# Altium PCB Ninja_ECU_PCB.PcbDoc (part 2 of 3)
Units mm, origin at the board's own origin, x right, y up, seen from the top; angles counter-clockwise.
Board outline 80.01 x 89.03 mm, 4 copper layers (Top Layer, Signal Layer 1, Signal Layer 2, Bottom Layer), stack 0.778 mm thick; 215 components, 159 nets, 825 pads, 332 vias.
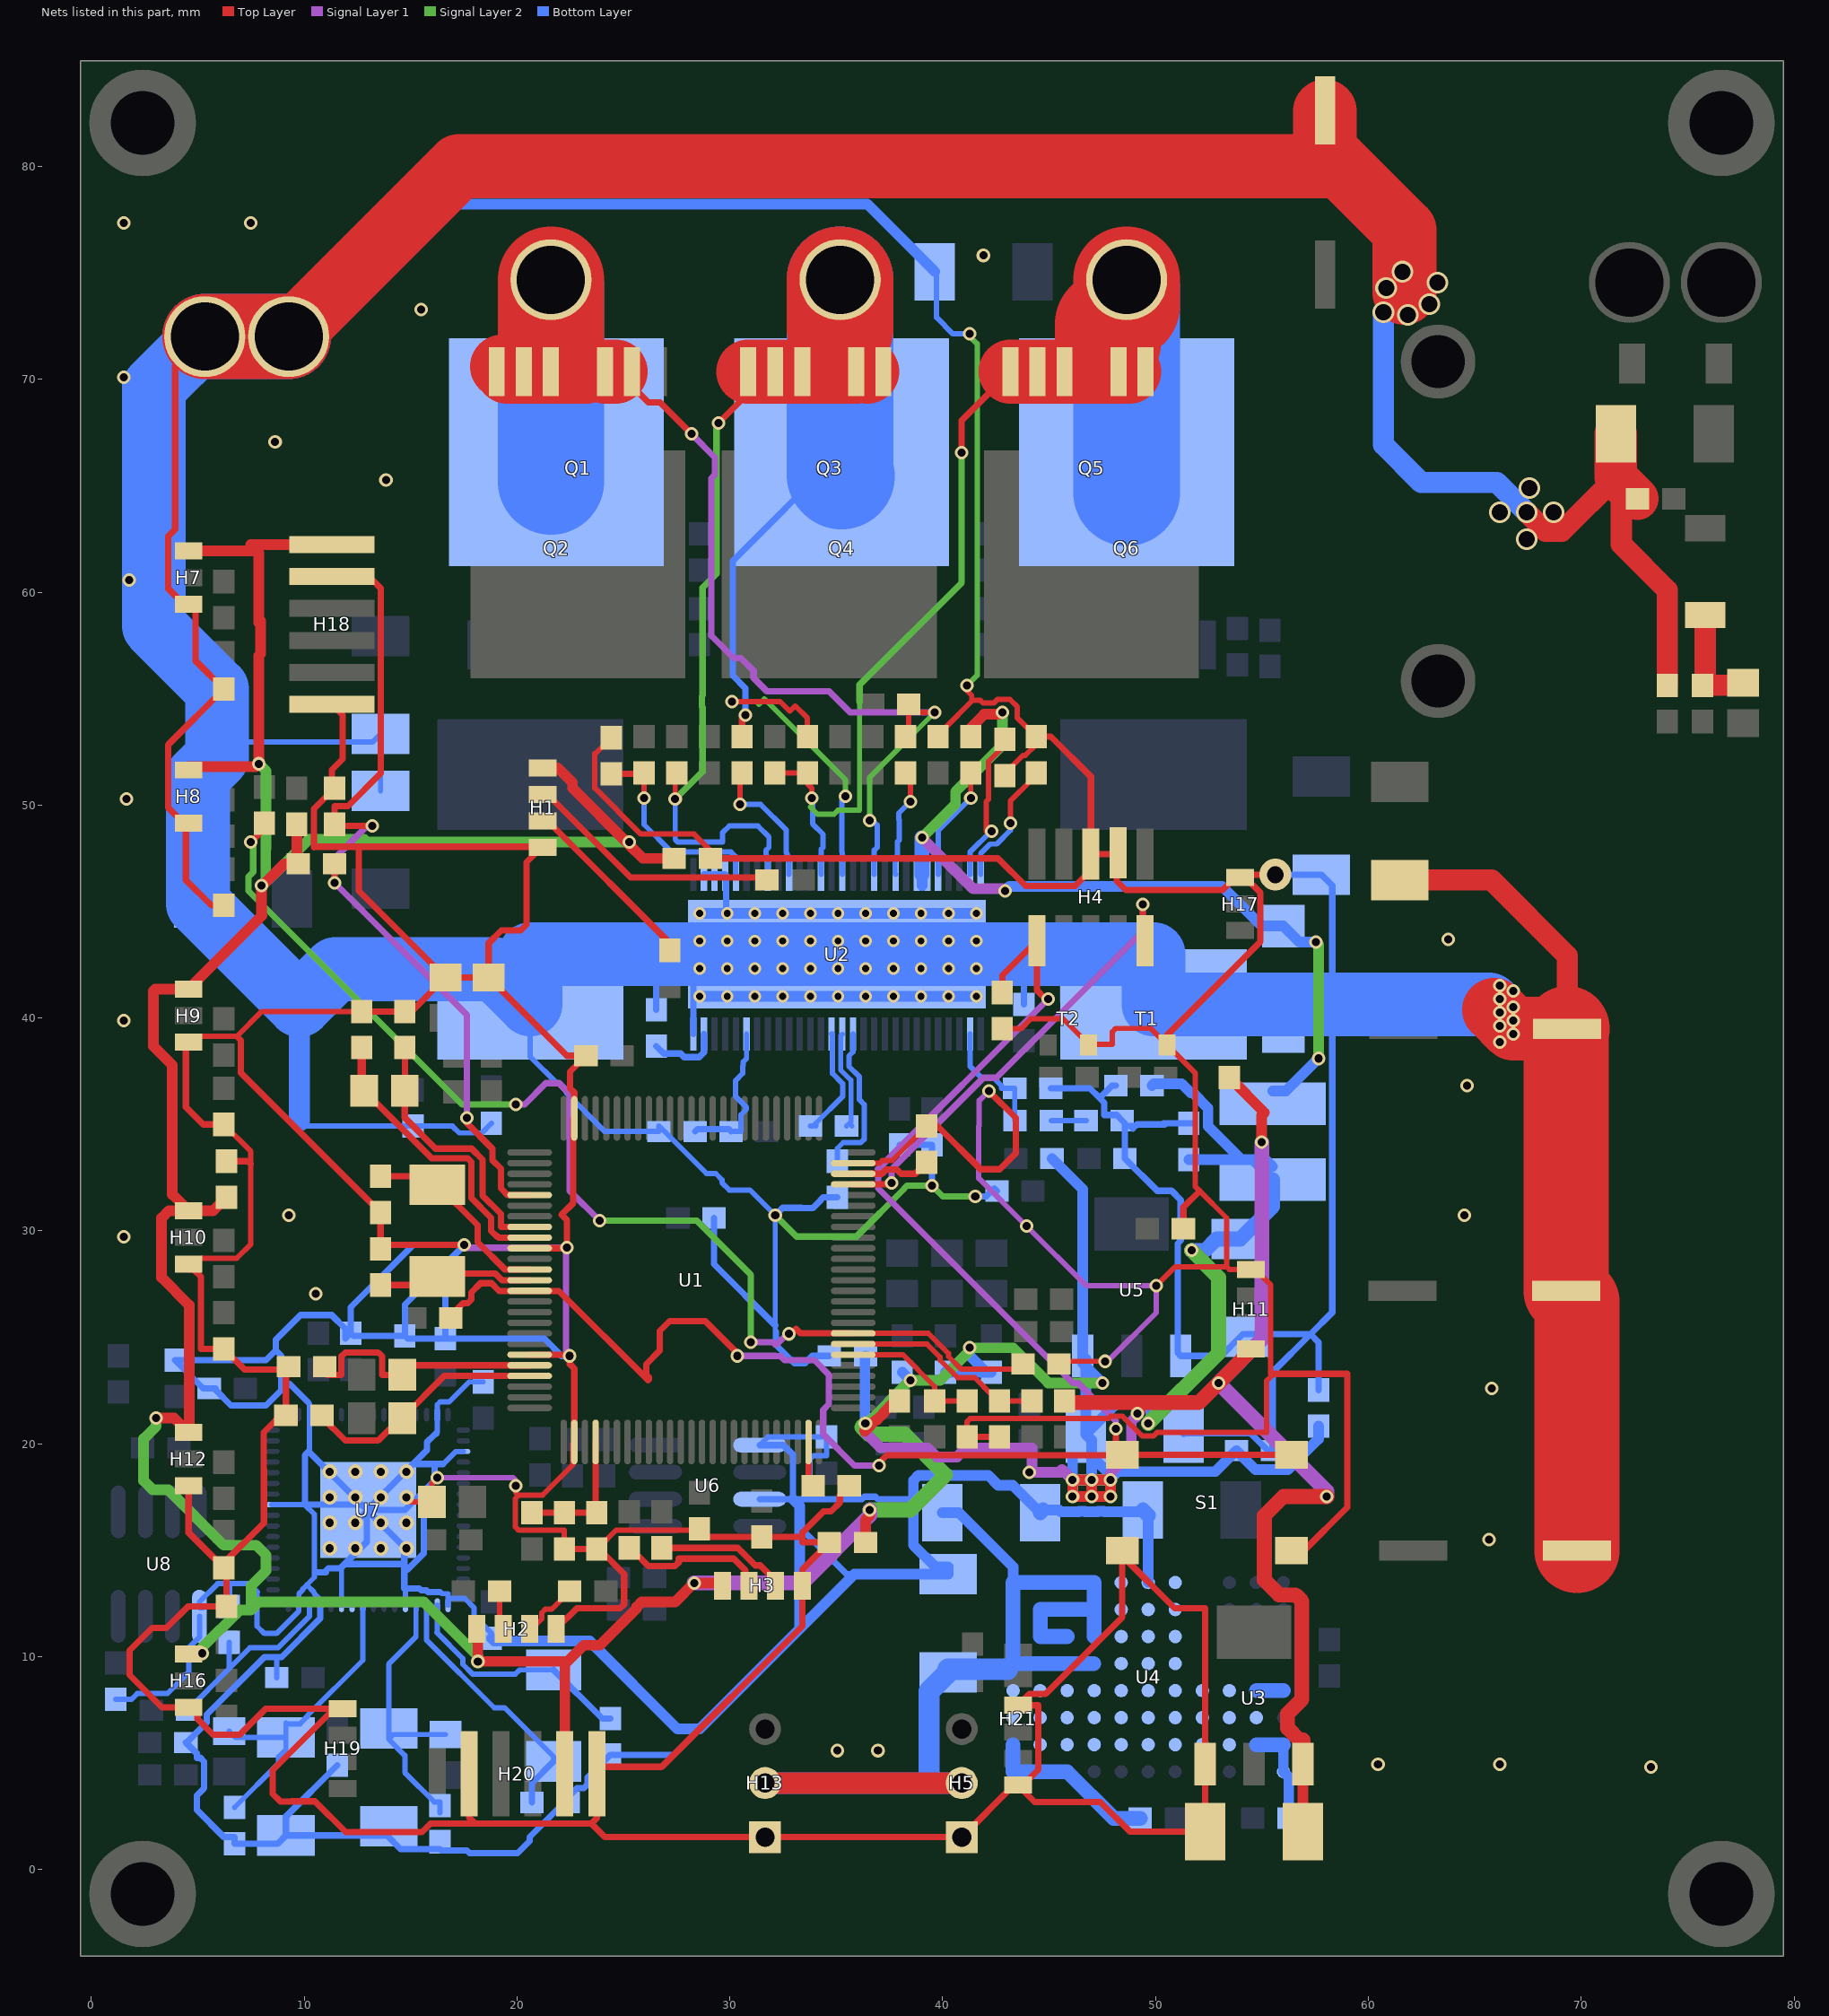
[diagram p4: the nets of this part, all layers, seen from the top]

## Via types
v1: diameter 0.635, hole 0.381, Top Layer to Bottom Layer, tented both sides, 252 vias
v2: diameter 0.584, hole 0.33, Top Layer to Bottom Layer, 44 vias
v3: diameter 0.69, hole 0.381, Top Layer to Bottom Layer, tented both sides, 16 vias
v4: diameter 1.016, hole 0.762, Top Layer to Bottom Layer, tented both sides, 11 vias
v5: diameter 1.5, hole 0.8, Top Layer to Bottom Layer, tented both sides, 3 vias
v6: diameter 1.27, hole 0.711, Top Layer to Bottom Layer, tented both sides, 3 vias
v7: diameter 1.524, hole 1.27, Top Layer to Bottom Layer, 2 vias
v8: diameter 0.635, hole 0.381, Top Layer to Bottom Layer, 1 vias

## Nets (pads, with @x,y where several pads share a name; then routed paths per layer and width w, separated by ;. In a path a pad name is that pad's centre, name@x,y a point inside that pad or via, vN(x,y) a via of type N, cw(c..) or ccw(c..) an arc to the next point about the centre after c; other vN are vias at no path point) (continued)
5V_IRFS: C19.2 C20.2 C21.2 C22.2 C25.2 C26.2 C27.2 C29.2 C32.2 C35.1 C57.2 H1.4 H2.4 H3.4 H7.3 H8.3 H9.3 H10.3 H11.4 H12.3 H16.3 H18.6 H20.2 L4.2 R32.2 R34.2 R36.2 R37.2 R41.1 R42.1 R43.1 R53.2 R87.1 U3.3 U5.3 | length 345
  Top Layer w0.5: v1(3.048,21.209) 3.897,21.209 H12.3@4.572,20.534 4.596,20.558 4.596,26.519 3.302,27.813 3.302,30.607 3.643,30.948 H10.3@4.38,30.948 ; H9.3@4.38,41.362 3.008,41.362 2.921,41.275 2.921,38.671 3.809,37.783 3.809,31.711 H10.3@4.572,30.948 5.724,30.948 C20.2@6.35,31.574 ; H16.3@4.572,10.12 5.167,10.12 v1(5.207,10.16) H16.3@4.826,10.16 ; H9.3@4.572,41.362 8.024,44.814 8.001,44.836 v1(8.001,46.228) 8.054,46.228 9.07,47.244 R37.2@9.73,47.244 9.652,47.322 R32.2@9.652,49.1 ; H8.3@4.572,51.649 4.572,51.801 v1@7.732,51.801 ; H7.3@4.572,61.936 7.787,61.936 ; v1(7.874,51.943) 7.874,57.021 7.959,57.106 7.959,58.647 7.874,58.563 7.874,61.849 7.787,61.936 ; H18.6@11.303,62.237 7.486,62.237 7.787,61.936 ; H2.4@18.099,11.303 18.161,11.365 v1(18.161,9.779) 22.373,9.779 ; H1.4@21.209,51.751 21.909,51.751 22.606,51.054 22.606,50.8 25.146,48.26 v1(25.273,48.26) 25.273,48.133 25.908,47.498 C21.2@27.383,47.498 ; H20.2@22.249,4.494 22.249,9.656 22.373,9.779 ; H3.4@29.656,13.335 29.529,13.462 v1(28.321,13.462) 27.431,12.572 25.851,12.572 25.615,12.336 25.615,12.259 23.897,10.54 23.133,10.54 22.373,9.779 ; v1(36.366,20.955) 36.366,20.618 ; C22.2@36.371,15.367 36.371,16.432 36.576,16.637 v1(36.576,16.891) ; R36.2@37.895,22.02 37.768,22.02 37.246,21.498 37.246,21.457 36.923,21.134 36.882,21.134 36.366,20.618 ; 48.895,21.931 49.276,21.55 v1(49.149,21.423) ; R87.1@53.467,37.211 55.118,35.56 54.991,35.433 v1(54.991,34.163) ; C19.2@56.924,1.778 U3.3@56.924,4.953 ; 36.366,20.618 36.366,20.606 36.349,20.588 36.343,20.595 36.366,20.618 ; v1(46.99,17.526) v1(46.99,18.302) ; v1(46.99,17.526) v1(46.101,17.526) v1(46.101,18.302) v1(46.99,18.302) ; v1(46.99,17.526) v1(47.879,17.526) v1(47.879,18.302) v1(46.99,18.302)
  Top Layer w0.7: R34.2@45.72,22.02 45.809,21.931 48.895,21.931 52.03,21.931 v1(52.959,22.86) 54.483,24.384 H11.4@54.483,24.449 ; U3.3@56.924,4.953 56.924,6.092 56.756,6.092 56.203,6.645 56.203,7.325 56.876,7.998 56.876,12.611 56.582,12.905 55.802,12.905 55.111,13.596 55.111,16.63 56.007,17.526 v1(58.039,17.526)
  Signal Layer 1 w0.5: v1(36.366,20.955) 36.366,20.565 36.349,20.547 37.084,19.812 39.288,19.812 39.717,19.383 40.674,19.383 41.103,19.812 44.196,19.812 44.196,18.796 v1(44.069,18.669) 45.48,18.669 45.607,18.796 v1(46.101,18.302) v1(46.99,18.302) ; v1@46.101,18.288 v1(46.101,17.526) v1(46.99,17.526) ; v1(49.149,21.423) 49.149,21.336 48.862,21.049 48.862,19.583 47.879,18.6 v1(47.879,18.302) ; v1(46.99,17.526) v1(46.99,18.302) ; v1(46.99,17.526) v1(47.879,17.526) v1(47.879,18.302) ; v1(46.99,18.302) v1(47.879,18.302)
  Signal Layer 1 w0.7: v1(28.321,13.462) 33.401,13.462 36.576,16.637 v1(36.576,16.891) ; v1(54.991,34.163) 54.991,25.146 55.118,25.019 v1(52.959,22.86) 58.039,17.78 v1(58.039,17.526)
  Signal Layer 2 w0.5: v1(3.048,21.209) 3.048,20.828 2.455,20.235 2.455,18.269 2.884,17.84 3.623,17.84 6.223,15.24 7.749,15.24 8.213,14.776 8.213,14.035 7.515,13.338 7.515,12.214 7.874,12.573 15.621,12.573 18.161,10.033 v1(18.161,9.779) ; v1(5.207,10.16) 5.207,10.427 6.972,12.192 7.493,12.192 ; v1(7.874,51.943) 8.213,51.604 8.213,47.962 8.195,47.944 8.195,46.37 10.213,48.387 12.825,48.387 12.952,48.26 v1(25.273,48.26) ; v1(36.366,20.955) 36.366,20.872 v1(38.481,22.987) 39.878,22.987 41.275,24.384 v1(41.275,24.511) 43.307,24.511 44.958,22.86 v1(47.498,22.86) ; v1@44.115,18.75 44.215,18.65 45.753,18.65 v1(46.101,18.302) v1(46.99,18.302) ; v1@46.101,18.288 v1(46.101,17.526) v1(46.99,17.526) ; v1(46.99,17.526) v1(46.99,18.302) ; v1(46.99,17.526) v1(47.879,17.526) v1(47.879,18.302) v1(46.99,18.302)
  Signal Layer 2 w0.7: v1(36.366,20.955) 36.196,20.784 36.527,20.453 38.221,20.453 40.132,18.542 38.481,16.891 v1(36.576,16.891) ; v1(49.657,20.955) 52.959,24.257 52.959,27.813 v1(51.689,29.083)
  Bottom Layer w0.5: 36.349,20.601 36.349,24.108 C26.2@36.371,24.13 ; R43.1@38.1,23.368 v1(38.481,22.987) ; R42.1@40.132,23.368 R41.1@42.037,23.368 ; v1(41.275,24.511) 41.275,24.13 R41.1@42.037,23.368 ; R41.1@42.291,23.368 R41.1@42.037,23.368 ; R53.2@45.134,33.401 46.581,31.954 U5.3@46.581,24.13 ; C27.2@46.101,19.318 v1(46.101,18.302) ; v1(47.498,22.86) U5.3@46.722,23.636 ; v1(49.657,20.955) 49.784,21.082 49.784,21.971 48.246,21.971 C27.2@46.722,20.447 ; C25.2@49.833,36.83 49.918,36.915 51.225,36.915 51.647,36.493 51.74,36.493 52.464,35.769 52.464,34.912 L4.2@54.024,33.352 ; C32.2@51.562,33.352 L4.2@54.024,33.352 ; L4.2@55.499,32.407 L4.2@54.554,33.352 ; L4.2@55.499,33.02 55.167,33.352 L4.2@54.554,33.352 ; C35.1@57.658,20.828 57.658,20.225 56.216,18.783 54.701,18.783 C29.2@53.799,19.685 52.809,18.695 48.225,18.695 v1@47.879,18.349 ; v1(46.101,18.302) v1(46.99,18.302) ; v1(46.101,18.302) v1(46.101,17.526) v1(46.99,17.526) v1(47.879,17.526) v1(47.879,18.302) ; U5.3@46.581,24.13 46.581,23.777 U5.3@46.722,23.636 ; U5.3@46.581,24.13 46.722,23.989 U5.3@46.722,23.636 ; C27.2@46.722,20.447 U5.3@46.722,23.636 ; C27.2@46.722,20.447 46.99,20.179 C27.2@46.99,19.431 ; v1(46.99,18.302) C27.2@46.99,19.431 ; v1(46.99,18.302) v1(47.879,18.302) ; C27.2@46.99,19.431 47.879,18.542 v1@47.879,18.349 ; v1(47.879,18.302) v1@47.879,18.349 ; L4.2@54.024,33.352 L4.2@54.554,33.352
  Bottom Layer w0.7: v1(51.689,29.083) 52.324,29.083 52.86,29.619 C57.2@53.975,29.619 55.499,31.143 L4.2@55.499,32.407
5V_SERVO: C23.2 C24.2 H5.2 H13.2 U4.12 | length 54.4
  Top Layer w1: H13.2@31.655,4.064 H5.2@40.894,4.064
  Bottom Layer w0.5: C23.2@39.977,16.764 40.767,16.764 43.307,14.224 U4.12@43.307,13.487 ; C24.2@40.259,9.271 42.901,9.271 43.045,9.415 U4.12@43.307,9.677
  Bottom Layer w0.7: U4.12@45.847,10.947 U4.12@44.577,10.947 U4.12@44.577,12.217 U4.12@45.847,12.217 U4.12@47.117,12.217 ; U4.12@47.092,9.677 U4.12@45.847,9.677 U4.12@44.577,9.677 U4.12@43.307,9.677 U4.12@43.307,10.947 U4.12@43.307,12.217 U4.12@43.307,13.487 U4.12@44.577,13.487 U4.12@45.847,13.487 U4.12@47.117,13.487 U4.12@47.117,12.217 ; U4.12@47.117,10.947 U4.12@47.117,12.217
  Bottom Layer w1: H13.2@31.655,4.064 39.354,4.064 ; H5.2@40.894,4.064 39.354,4.064 ; 43.045,9.415 40.259,9.415 C24.2@40.259,9.271 39.354,8.366 39.354,4.064
GND_STM: C1.1 C2.1 C3.1 C4.1 C5.1 C6.1 C7.1 C8.1 C9.1 C10.1 C11.1 C12.2 C13.2 C14.1 C15.1 C16.1 C17.1 C18.1 C19.1 C20.1 C21.1 C22.1 C23.1 C24.1 C25.1 C26.1 C27.1 C28.1 C29.1 C30.1 C31.1 C32.1 C33.1 C34.1 C35.2 C36.1 C37.2 C39.1 C40.1 C41.1 C42.1 C43.1 C45.1 C46.1 C47.1 C48.2 C49.1 C50.1 C54.1 C55.1 C56.1 C57.1 C58.1 C59.2 C60.1 C61.2 C62.2 C63.2 C64.2 C65.2 C66.2 C67.2 C68.2 C69.2 C70.2 C71.2 C72.2 C73.2 C74.1 C75.2 C76.1 C77.1 D2.1 H1.1 H2.1 H3.1 H4.3 H4.5 H5.1 H7.1 H8.1 H9.1 H10.1 H11.1 H12.1 H13.1 H16.1 H17.1 H18.1 H19.4 H20.1 H20.5 H21.3 H21.6 LED1.2 LED2.2 LED6.2 pad.1@5.334,72.009 pad.1@9.271,72.009 R6.1 R8.2 R12.2 R14.2 R16.2 R19.2 R24.2 R31.2 R39.1 R40.1 R44.1 R50.1 R51.1 R52.2 R55.2 R62.1 R64.2 R67.1 R79.1 R86.1 S1.1 T1.2 T2.2 U1.10 U1.20 U1.27 U1.74 U1.99 U2.28 U2.30 U2.31 U2.32 U2.57 U3.1 U4.4 U4.7 U5.1 U6.5 U6.7 U7.1 U7.5 U7.10 U7.11 U7.13 U7.15 U7.25 U7.35 U7.47 U7.51 U7.65 U8.5 | length 1246.6
  Top Layer w0.25: H10.1@5.145,28.721 6.838,28.721 7.493,29.376 7.493,33.147 7.493,33.733 R16.2@6.223,35.003 ; H9.1@5.145,39.135 6.838,39.135 8.011,40.308 C13.2@12.7,40.308 ; v3@14.754,17.491 14.973,17.272 LED6.2@16.007,17.272 16.007,18.166 v1(16.256,18.415) ; v1(19.939,18.034) 19.939,17.708 20.071,17.576 ; R8.2@22.225,15.064 22.225,15.937 20.086,15.937 19.924,16.099 19.924,17.429 20.071,17.576 ; U1.27@22.694,20.086 22.621,20.013 22.621,19.009 21.204,17.591 20.086,17.591 20.071,17.576 ; C7.1@23.749,15.064 23.851,15.064 23.851,15.133 24.658,15.94 28.513,15.94 C11.1@28.575,16.002 ; C56.1@24.432,53.164 23.671,52.402 23.655,52.418 23.655,50.799 25.813,48.641 28.321,48.641 29.083,47.879 C21.1@29.083,47.498 ; U1.74@35.794,33.186 37.039,33.186 37.158,33.305 37.623,33.305 C2.1@39.243,34.925 ; R55.2@39.785,53.213 40.132,53.213 40.132,53.655 41.362,54.885 ; C16.1@41.148,20.32 41.148,21.049 41.291,21.193 47.792,21.193 47.895,21.296 48.445,21.296 48.554,21.187 48.554,21.176 48.903,20.828 48.914,20.828 49.381,20.36 49.903,20.36 50.085,20.542 55.21,20.542 55.21,22.952 55.447,23.188 ; v1(41.148,55.626) 41.021,55.499 41.362,55.158 41.362,54.885 ; C6.1@42.799,39.497 43.672,39.497 44.14,39.965 45.66,39.965 46.858,38.767 47.964,38.767 47.964,39.35 48.126,39.512 49.764,39.512 T1.2@50.541,38.735 51.856,37.42 51.856,32.091 52.07,31.877 53.34,30.607 53.34,28.321 ; C72.2@42.926,51.386 42.926,51.491 43.776,52.34 43.88,52.34 44.391,52.851 C43.1@44.391,53.213 43.503,54.1 43.503,54.62 43.164,54.96 42.581,54.96 42.579,54.958 42.56,54.958 42.395,54.793 41.902,54.793 41.773,54.922 41.399,54.922 41.362,54.885 ; C14.1@45.466,23.749 45.593,23.876 v1(47.625,23.876) ; v1(50.038,27.432) 50.927,28.321 53.34,28.321 ; 55.41,23.279 55.41,27.459 54.675,28.194 H11.1@54.483,28.194 53.467,28.194 53.34,28.321
  Top Layer w0.3: H12.1@4.572,18.034 4.572,15.826 R24.2@6.112,14.286 ; H10.1@4.572,28.448 4.572,28.198 4.801,28.198 5.149,27.85 5.149,24.462 R19.2@6.223,24.462 7.19,23.495 9.144,23.495 9.144,21.59 8.095,20.541 8.095,18.816 8.113,18.799 8.113,16.287 R24.2@6.112,14.286 ; H9.1@4.572,38.862 4.445,38.735 4.445,35.814 5.256,35.003 R16.2@6.223,35.003 ; pad.1@5.334,72.009 3.937,70.612 3.937,62.956 3.62,62.638 3.62,60.161 4.344,59.436 H7.1@4.572,59.436 4.904,59.104 4.904,56.769 R12.2@6.223,55.45 3.62,52.847 3.62,49.874 4.344,49.149 H8.1@4.572,49.149 4.445,49.022 4.445,46.482 5.637,45.29 R14.2@6.223,45.29 R14.2@6.223,45.593 ; C20.1@6.35,33.274 7.366,33.274 7.493,33.147 ; 6.856,39.117 7.025,38.947 7.025,37.425 C1.1@13.589,30.861 C3.1@13.589,29.161 13.765,29.337 v1(17.526,29.337) ; H18.1@11.303,54.737 11.811,54.229 11.811,52.171 11.303,51.663 11.303,50.927 C17.1@11.43,50.8 10.454,49.824 10.454,48.022 10.478,48.046 12.573,48.046 ; H19.4@11.811,7.555 H19.4@11.406,7.555 ; C13.2@12.7,40.308 C12.2@14.732,40.308 15.04,40.308 LED2.2@16.637,41.905 ; H20.5@17.749,4.494 17.749,2.444 18.034,2.159 ; U1.20@20.594,24.186 22.423,24.186 v1(22.479,24.13) 22.479,23.749 22.694,23.534 U1.27@22.694,20.086 ; U1.10@20.594,29.186 22.328,29.186 v1(22.352,29.21) 22.352,30.511 22.098,30.765 22.646,31.313 22.646,35.238 U1.99@22.694,35.286 22.694,36.5 22.494,36.7 22.494,37.48 R6.1@23.241,38.227 22.347,38.227 LED1.2@18.669,41.905 ; H2.1@21.844,11.303 22.82,12.279 24.854,12.279 25.031,12.456 25.031,13.883 24.654,14.261 24.648,14.261 24.471,14.438 24.471,14.444 C7.1@23.851,15.064 ; R8.2@22.225,15.064 C7.1@23.749,15.064 ; C11.1@28.575,16.002 28.956,15.621 C10.1@31.496,15.621 33.401,15.621 ; C21.1@29.083,47.498 42.6,47.498 43.899,46.199 46.22,46.199 47.117,47.096 47.117,47.498 46.761,47.498 H4.5@46.965,47.701 ; C4.1@35.609,18.034 35.164,17.589 35.164,17.242 34.751,16.829 34.404,16.829 33.401,15.826 33.401,15.621 ; C2.1@39.243,34.925 39.751,34.925 41.783,32.893 42.672,32.893 43.434,33.655 43.434,35.306 v1(42.164,36.576) ; C16.1@41.148,20.32 C15.1@42.672,20.32 ; C43.1@44.391,53.213 45.085,53.213 46.965,51.333 H4.5@46.965,47.701 ; S1.1@48.438,14.986 S1.1@48.438,14.732 ; T1.2@50.541,38.735 50.541,39.197 54.927,43.584 54.927,45.884 H17.1@54.203,46.609 ; C9.1@51.308,30.099 51.308,31.115 52.07,31.877 ; 55.447,23.188 55.548,23.289 59.007,23.289 59.007,17.018 56.975,14.986 S1.1@56.388,14.986 ; v5(55.626,46.736) 54.33,46.736 H17.1@54.203,46.609 ; C77.1@57.959,82.597 C77.1@57.959,82.63 ; R24.2@6.112,14.286 R24.2@6.223,14.175 ; R24.2@6.112,14.286 6.001,14.175 R24.2@6.223,14.175 ; R24.2@6.223,14.175 6.35,14.048 R31.2@6.35,12.368 4.551,12.368 3.53,11.348 2.851,11.348 1.793,10.29 1.793,9.141 3.314,7.62 H16.1@4.572,7.62 4.637,7.555 4.76,7.555 4.992,7.323 4.992,7.071 5.725,6.338 6.975,6.338 8.192,7.555 H19.4@11.406,7.555 ; H19.4@11.406,7.555 8.524,4.673 8.524,3.553 8.887,3.19 9.401,3.19 9.418,3.208 10.508,3.208 11.96,1.756 15.535,1.756 15.938,2.159 18.034,2.159 ; 12.573,48.046 21.169,48.046 20.447,47.325 20.447,44.393 20.167,44.114 19.265,44.114 18.669,43.517 LED1.2@18.669,41.905 ; 12.573,48.046 12.573,45.969 LED2.2@16.637,41.905 ; LED2.2@16.637,41.905 LED1.2@18.669,41.905 ; 18.034,2.159 23.495,2.159 ; 23.495,2.159 23.749,2.413 H20.1@23.749,4.494 24.081,4.826 26.797,4.826 33.401,11.43 H3.1@33.401,13.335 33.401,14.097 C22.1@34.671,15.367 33.401,15.367 33.401,15.621 ; 23.495,2.159 24.13,1.524 H13.1@31.655,1.524 H5.1@40.894,1.524 43.336,3.966 H21.6@43.536,3.966 ; H21.6@43.536,3.966 43.769,3.966 44.488,4.686 44.488,7.716 H21.3@43.536,7.716 44.078,8.258 44.834,8.258 48.438,11.862 S1.1@48.438,14.732 ; H21.6@43.536,3.966 44.327,3.175 47.402,3.175 48.799,1.778 C19.1@52.324,1.778 U3.1@52.324,4.953 52.324,12.281 50.889,12.281 S1.1@48.438,14.732 ; H4.5@46.965,47.701 48.184,47.701 48.184,46.431 48.597,46.018 53.156,46.018 53.747,46.609 H17.1@53.975,46.609 H17.1@54.203,46.609
  Top Layer w1: C40.1@61.468,46.482 65.786,46.482 69.342,42.926 C76.1@69.342,39.497 ; v4(67.437,63.754) 68.326,62.865 69.09,62.865 71.628,65.403 71.882,65.149 71.882,62.258 74.041,60.099 C75.2@74.041,55.626
  Top Layer w2: 71.628,65.403 C74.1@71.628,67.437 ; 71.882,65.149 C73.2@72.642,64.389
  Top Layer w3: pad.1@9.271,72.009 17.277,80.015 58.683,80.015 ; C77.1@57.959,82.597 57.959,80.739 58.683,80.015 ; 61.695,74.068 61.695,77.003 58.683,80.015 ; v1@65.913,40.386 66.802,39.497 C76.1@69.342,39.497
  Top Layer w4: pad.1@5.334,72.009 pad.1@9.271,72.009 ; C76.1@69.342,39.497 69.295,39.45 C31.1@69.295,27.178 69.803,26.67 C28.1@69.803,14.986
  Signal Layer 1 w0.25: v1(16.256,18.415) 19.812,18.415 20.071,18.156 19.948,18.034 v1(19.939,18.034) ; v1@41.148,55.554 41.123,55.528 41.025,55.626 v1(41.148,55.626) ; v1(42.164,36.576) 41.714,36.126 41.714,34.935 41.696,34.917 41.696,32.472 v1(43.942,30.226) 46.736,27.432 v1(50.038,27.432) 50.038,26.162 47.625,23.749 v1(47.625,23.876)
  Signal Layer 1 w0.3: v1(17.526,29.337) 17.653,29.21 v1(22.352,29.21) 22.298,29.156 22.298,24.33 22.479,24.148 v1(22.479,24.13) ; v1@42.164,36.412 v1(42.164,36.576)
  Signal Layer 1 w1: v4(60.706,73.152) 62.611,75.057
  Signal Layer 2 w0.25: v1(41.148,55.626) 41.616,56.094 41.616,71.668 41.275,72.009 v1(41.275,72.136)
  Signal Layer 2 w0.3: v1(32.131,30.734) 33.132,29.733 35.944,29.733 38.212,32.001 38.212,32.026 38.317,32.131 v1(39.497,32.131) 40.005,31.623 v1(41.529,31.623)
  Bottom Layer w0.23: U7.11@11.755,12.416 U7.10@12.204,12.416
  Bottom Layer w0.25: C69.2@1.143,8.001 1.894,8.001 2.158,8.265 3.566,8.265 4.572,9.271 4.572,10.414 5.08,10.922 U8.5@5.08,11.901 ; 5.16,51.501 5.458,51.8 6.618,52.959 13.208,52.959 C49.1@13.589,53.34 C50.1@13.589,50.673 ; U8.5@5.247,12.303 5.08,12.303 5.08,12.573 5.935,13.428 6.477,13.428 7.423,13.428 7.816,13.035 7.787,13.007 7.787,11.438 8.136,11.089 8.697,11.089 9.755,12.147 U7.15@9.755,12.416 9.755,12.959 9.937,13.141 9.937,13.184 10.124,13.371 ; U7.25@8.479,17.141 U7.25@8.53,17.141 10.033,17.141 10.483,16.691 10.483,13.906 ; C66.2@8.714,9.017 8.714,9.938 8.763,9.987 ; 9.779,35.179 10.033,34.925 C39.1@15.113,34.925 16.963,34.925 17.287,34.602 18.346,34.602 C41.1@18.796,35.052 ; 10.124,13.328 10.124,13.371 ; 10.204,19.641 10.255,19.692 U7.35@10.255,21.366 10.255,21.876 ; 10.543,13.966 10.483,13.906 ; U7.13@10.755,12.416 10.755,12.686 10.472,12.969 10.472,13.023 10.124,13.371 ; U7.11@11.755,12.416 11.755,14.205 ; 14.704,13.208 14.755,13.157 U7.5@14.755,12.416 ; 16.204,20.485 16.255,20.536 U7.47@16.255,21.366 16.255,21.843 16.38,21.968 16.807,21.968 17.747,22.909 C65.2@18.415,22.909 ; 16.381,13.043 16.406,13.018 16.421,13.018 16.477,12.963 16.755,12.963 U7.1@16.755,12.739 ; 16.534,19.05 17.125,19.641 U7.51@17.48,19.641 ; U7.1@16.755,12.416 U7.1@16.755,12.739 ; C67.2@18.796,10.873 18.796,11.104 17.976,11.923 17.976,12.304 17.542,12.739 U7.1@16.755,12.739 ; R86.1@20.625,40.64 20.625,38.176 21.884,36.917 21.963,36.917 22.312,36.568 22.312,36.489 24.13,34.671 C30.1@26.67,34.671 26.67,34.929 28.902,32.697 29.337,32.697 29.631,32.403 29.631,32.266 29.98,31.917 30.948,31.917 v1(32.131,30.734) 32.131,25.561 32.131,25.315 32.164,25.282 ; U6.5@31.406,19.939 31.787,20.32 C42.1@34.544,20.32 34.544,19.447 33.929,19.447 33.767,19.285 33.767,17.793 33.909,17.65 33.909,17.399 ; C55.1@39.624,75.057 39.711,74.97 39.711,72.906 40.48,72.136 v1(41.275,72.136) ; 10.124,13.371 10.483,13.731 10.483,13.906
  Bottom Layer w0.3: C37.2@6.477,12.368 6.477,13.428 ; 10.182,21.949 9.319,22.812 8.923,22.812 ; 10.543,13.966 11.016,13.966 10.983,13.999 11.138,14.154 11.704,14.154 ; U7.13@10.755,12.416 10.755,11.801 8.94,9.987 8.763,9.987 8.132,9.987 5.425,7.279 5.425,6.912 4.482,5.969 R62.1@4.445,5.969 4.953,5.461 4.953,5.247 5.12,5.247 5.297,5.07 5.297,3.82 4.968,3.49 4.968,2.791 6.235,1.524 6.731,1.524 C63.2@6.731,1.221 8.761,1.221 C58.1@9.144,1.604 ; R64.2@11.557,4.904 9.144,2.491 C58.1@9.144,1.604 ; 11.755,14.205 11.901,14.351 ; U7.65@12.354,17.491 10.204,19.641 10.033,19.47 10.033,17.141 12.704,17.141 U7.65@12.954,16.891 ; v3(12.405,16.291) U7.65@12.954,16.84 ; v3(13.605,17.491) U7.65@13.005,16.891 ; 16.204,20.485 16.151,20.432 16.126,20.432 15.763,20.069 15.763,19.7 U7.65@15.113,19.05 ; 16.381,13.043 15.816,13.043 15.746,13.114 15.498,13.114 15.404,13.208 14.704,13.208 14.704,14.097 ; 16.534,19.05 16.129,19.05 ; v1(22.479,24.13) 22.098,24.13 21.287,24.941 C68.2@16.637,24.941 ; 26.416,42.993 26.543,42.866 C46.1@26.543,40.386 ; U2.28@28.283,39.243 U2.57@28.283,42.904 ; 28.575,6.604 27.365,5.394 C59.2@24.384,5.394 23.319,4.329 23.319,4.005 23.142,3.828 22.818,3.828 22.401,3.411 C62.2@22.401,3.157 22.219,3.157 20.589,1.527 20.589,1.345 20.021,0.777 17.777,0.777 17.65,0.904 16.446,0.904 16.383,0.967 14.527,0.967 13.89,1.604 C58.1@9.144,1.604 ; U2.30@28.783,46.736 28.79,46.743 U2.31@29.283,46.743 U2.32@29.783,46.743 29.831,46.695 29.831,44.921 v2(29.88,44.921) ; C48.2@29.259,30.607 29.259,28.433 32.131,25.561 ; U6.7@31.406,17.399 32.958,17.399 ; U6.5@31.406,19.939 32.512,19.939 32.958,19.493 32.958,17.399 ; v1(32.131,30.734) 32.479,31.082 33.364,31.082 33.381,31.065 33.895,31.065 34.258,31.428 34.258,31.453 34.379,31.574 C34.1@35.052,31.574 ; 32.164,25.282 32.164,24.642 33.024,23.782 33.524,23.782 33.872,24.13 C26.1@34.671,24.13 ; 33.274,16.084 33.378,15.979 35.487,13.871 35.842,13.871 ; R44.1@37.973,34.036 R50.1@39.497,34.036 v1(39.497,32.131) ; 38.625,17.399 36.945,17.399 36.833,17.511 36.319,17.511 36.207,17.399 33.909,17.399 32.958,17.399 ; v1(41.529,31.623) 42.037,31.623 42.418,32.004 C45.1@42.545,31.877 ; R51.1@43.815,40.64 43.815,42.993 ; C36.1@45.085,36.703 46.912,36.703 47.371,36.244 ; C25.1@48.133,36.83 47.957,36.83 47.371,36.244 ; C33.1@48.768,34.925 49.05,34.925 49.128,35.003 50.431,35.003 50.382,35.052 C32.1@51.562,35.052 C32.1@51.816,35.052 ; C27.1@51.322,20.447 51.322,20.487 54.474,20.487 55.277,19.685 C29.1@55.499,19.685 55.499,23.368 57.277,25.146 ; v5(55.626,46.736) C54.1@57.785,46.736 58.301,46.22 58.301,40.64 58.301,26.17 57.277,25.146 ; C35.2@57.658,22.528 57.658,24.765 57.277,25.146 ; 8.669,24.388 8.205,23.925 C70.2@3.937,23.925 5.256,22.606 C61.2@5.539,22.606 5.842,22.606 5.842,22.525 6.564,21.804 8.202,21.804 8.923,22.524 8.923,22.812 ; 8.669,24.388 8.923,24.134 8.923,22.812 ; 8.669,24.388 8.669,24.888 9.828,26.047 11.293,26.047 11.938,25.403 11.938,24.941 R67.1@12.192,25.195 ; 11.901,14.351 14.704,14.351 ; 11.901,14.351 12.954,15.404 U7.65@12.954,16.84 ; R67.1@12.192,25.195 12.192,26.416 15.113,29.337 v1(17.526,29.337) 16.637,28.448 ; R67.1@12.192,25.195 12.319,25.068 C71.2@14.732,25.068 ; U7.65@12.954,16.84 U7.65@12.979,16.866 ; U7.65@12.954,16.84 U7.65@12.954,16.891 ; U7.65@12.954,16.891 U7.65@13.005,16.891 ; U7.65@12.954,16.891 U7.65@12.979,16.866 ; U7.65@12.954,16.891 U7.65@15.113,19.05 ; U7.65@12.979,16.866 U7.65@13.005,16.891 ; U7.65@12.979,16.866 14.704,15.141 14.704,14.351 ; U7.65@13.005,16.891 14.732,16.891 15.494,17.653 ; 14.704,14.097 14.704,14.351 ; 14.704,14.097 14.859,14.097 15.621,14.859 15.621,17.526 15.494,17.653 ; C71.2@14.732,25.068 14.859,24.941 C68.2@16.637,24.941 ; C71.2@14.732,25.068 14.732,26.543 16.637,28.448 ; U7.65@15.113,19.05 16.129,19.05 ; 15.494,17.653 v1(16.256,18.415) 16.129,18.542 16.129,19.05 ; C68.2@16.637,24.941 16.637,28.448 ; 47.371,36.244 47.588,36.027 47.588,35.444 48.171,35.444 C33.1@48.436,35.179 48.563,35.052 R52.2@48.563,33.401 50.082,31.882 50.756,31.882 51.181,31.458 51.181,29.554 51.037,29.41 51.037,24.274 U5.1@51.181,24.13 53.086,24.13 C57.1@53.975,25.019 54.102,25.146 57.277,25.146
  Bottom Layer w0.5: pad.1@9.271,72.009 15.494,78.232 36.449,78.232 C55.1@39.624,75.057 ; C67.2@18.796,10.873 18.937,10.732 23.419,10.732 27.548,6.604 28.575,6.604 33.274,11.303 ; v2(28.58,41.021) v2(29.88,41.021) v2(31.18,41.021) v2(32.48,41.021) v2(33.78,41.021) v2(35.08,41.021) v2(36.38,41.021) v2(37.68,41.021) v2(38.98,41.021) v2(40.28,41.021) v2(41.58,41.021) ; v2(28.58,44.921) U2.57@29.831,44.921 ; v2(29.88,44.921) v2(31.18,44.921) v2(32.48,44.921) v2(33.78,44.921) v2(35.08,44.921) v2(36.38,44.921) v2(37.68,44.921) v2(38.98,44.921) v2(40.28,44.921) v2(41.58,44.921) ; 32.958,17.399 33.274,17.083 33.274,16.084 33.274,15.875 ; 33.378,15.979 33.274,15.875 ; C23.1@44.577,16.764 43.297,18.044 42.614,18.044 42.142,18.516 38.86,18.516 38.625,18.281 38.625,17.399 38.625,15.247 39.648,14.224 40.259,14.224 C24.1@40.259,13.871 35.842,13.871 33.274,11.303 ; C23.1@44.704,16.891 45.466,16.891 45.551,16.806 46.399,16.806 46.417,16.824 46.674,16.824 46.692,16.806 47.288,16.806 47.306,16.824 47.563,16.824 47.581,16.806 49.318,16.806 C18.1@49.403,16.891 ; U4.7@49.657,13.487 C18.1@49.657,16.637 ; U4.4@56.007,5.867 U4.7@56.007,4.597 56.261,4.343 R40.1@56.261,2.413 ; 33.274,11.303 33.274,15.875
  Bottom Layer w0.7: U4.7@43.307,5.867 U4.7@43.307,4.597 U4.7@44.577,4.597 U4.7@45.847,4.597 48.031,2.413 R39.1@49.276,2.413 ; C23.1@44.577,16.764 C23.1@44.704,16.891 ; C18.1@49.403,16.891 C18.1@49.657,16.637 ; U4.7@54.737,5.867 U4.4@56.007,5.867 ; U4.7@54.737,8.407 U4.7@56.007,8.407
  Bottom Layer w1: 9.779,35.179 9.779,40.603 ; v4(60.706,73.152) 60.706,66.929 62.484,65.151 66.04,65.151 v4(67.437,63.754)
  Bottom Layer w3: 5.16,51.501 5.015,51.356 5.015,45.367 9.742,40.64 ; pad.1@5.334,72.009 2.937,69.612 2.937,58.419 5.904,55.452 5.904,52.245 5.458,51.8 ; 9.779,40.603 11.467,42.291 18.974,42.291 R86.1@20.625,40.64 20.625,42.993 26.416,42.993 U2.57@28.194,42.993 ; U2.57@28.58,42.993 U2.57@35.033,42.993 43.815,42.993 49.905,42.993 R79.1@49.905,40.64 58.301,40.64 65.659,40.64 v1@65.913,40.386
  Bottom Layer w4: pad.1@5.334,72.009 pad.1@9.271,72.009
  other v1: 73.279,4.826 60.452,4.953 66.167,4.953 35.052,5.588 36.957,5.588 65.659,15.494 65.786,22.606 10.541,27.051 1.524,29.718 9.271,30.734 64.516,30.734 64.643,36.83 66.167,38.862 66.802,39.243 66.167,39.624 1.524,39.878 66.802,39.878 66.167,40.259 66.802,40.513 66.167,40.894 66.802,41.275 66.167,41.529 63.754,43.688 1.651,50.292 1.778,60.579 13.843,65.278 8.636,67.056 1.524,70.104 15.494,73.279 41.91,75.819 1.524,77.343 7.493,77.343
  other v2: 28.58,42.321 29.88,42.321 31.18,42.321 32.48,42.321 33.78,42.321 35.08,42.321 36.38,42.321 37.68,42.321 38.98,42.321 40.28,42.321 41.58,42.321 28.58,43.621 29.88,43.621 31.18,43.621 32.48,43.621 33.78,43.621 35.08,43.621 36.38,43.621 37.68,43.621 38.98,43.621 40.28,43.621 41.58,43.621
  other v3: 11.205,15.091 12.405,15.091 13.605,15.091 14.805,15.091 11.205,16.291 13.605,16.291 14.805,16.291 11.205,17.491 12.405,17.491 14.805,17.491 11.205,18.691 12.405,18.691 13.605,18.691 14.805,18.691
  other v4: 67.437,62.484 66.167,63.754 68.707,63.754 67.564,64.897 61.849,73.025 62.865,73.533 60.833,74.295 63.246,74.549 61.595,75.057
NetBLDC1_1: C51.1 pad.1@21.59,74.676 Q1.3 Q2.2 R74.2 U2.46 | length 55.4
  Top Layer w0.25: C51.1@38.403,53.366 R74.2@38.403,54.737 ; R74.2@38.409,54.737 R74.2@38.403,54.737 ; v1(39.624,54.356) 38.784,54.356 R74.2@38.403,54.737
  Top Layer w0.3: Q1.3@25.4,70.358 25.146,70.104 25.146,69.937 26.17,68.913 26.718,68.913 v1(28.194,67.437)
  Top Layer w3: Q1.3@19.298,70.606 19.547,70.358 Q1.3@20.32,70.358 Q1.3@21.59,70.358 23.241,70.358 ; 21.59,72.009 21.78,71.819 ; Q1.3@24.13,70.358 24.643,70.358
  Top Layer w5: 21.59,72.009 pad.1@21.59,74.676
  Signal Layer 1 w0.3: v1(28.194,67.437) 29.304,66.327 29.304,65.536 29.129,65.361 29.129,57.962 30.189,56.902 30.522,56.902 31.121,56.303 31.121,55.97 31.752,55.339 34.667,55.339 35.65,54.356 v1(39.624,54.356)
  Signal Layer 2 w0.25: v1(36.576,49.276) 36.576,51.308 v1(39.624,54.356)
  Bottom Layer w0.25: v1(36.576,49.276) 36.703,49.276 36.917,49.062 36.917,48.014 36.783,47.88 U2.46@36.783,46.743
  Bottom Layer w5: Q2.2@21.59,65.192 pad.1@21.59,74.422
NetBLDC1_2: C53.1 pad.2@35.179,74.676 Q3.3 Q4.2 R78.2 U2.36 | length 65.7
  Top Layer w0.25: v1@27.503,50.139 27.432,50.209 v1(27.432,50.292) 27.432,51.442 R78.2@27.503,51.513
  Top Layer w0.3: v1(29.464,67.945) 30.861,69.342 Q3.3@30.861,70.358 ; C53.1@30.573,53.213 30.573,54.195 v1@30.734,54.356
  Top Layer w3: Q3.3@30.861,70.358 Q3.3@32.131,70.358 Q3.3@33.401,70.358 Q3.3@35.941,70.358 ; 35.179,71.633 35.179,72.39 ; Q3.3@36.197,70.614 36.454,70.358
  Top Layer w5: 35.179,72.39 pad.2@35.179,74.676
  Signal Layer 2 w0.3: v1(27.432,50.292) 28.717,51.577 28.717,54.577 28.687,54.607 28.687,55.121 28.717,55.151 28.717,60.218 29.37,60.87 29.37,67.851 v1(29.464,67.945) ; v1@30.607,54.226 30.61,54.229 v1(30.734,54.229)
  Bottom Layer w0.25: v1(27.432,50.292) 27.432,48.387 27.559,48.26 29.663,48.26 29.663,48.713 29.972,49.022 31.321,49.022 31.837,48.506 31.837,48.014 31.693,47.87 31.693,47.65 31.783,47.56 U2.36@31.783,46.743
  Bottom Layer w0.3: v1(30.734,54.229) 30.734,55.482 30.138,56.078 30.138,61.469 35.179,66.51 Q4.2@35.242,66.573
  Bottom Layer w5: pad.2@35.179,74.676 35.179,66.51 35.179,65.51 Q4.2@35.242,65.446
NetBLDC1_3: C52.1 pad.3 Q5.3 Q6.2 R83.2 U2.41 | length 51.9
  Top Layer w0.25: R83.2@32.108,51.513 C52.1@33.644,51.513 33.909,51.248 33.655,50.994 33.858,50.791 v1(33.858,50.341)
  Top Layer w0.3: v1(40.894,66.548) 40.894,68.072 Q5.3@43.18,70.358
  Top Layer w3: Q5.3@43.18,70.358 Q5.3@44.45,70.358 Q5.3@45.72,70.358 Q5.3@48.26,70.358 48.773,70.358
  Top Layer w5: 47.773,71.776 47.773,72.599 48.641,73.468 pad.3@48.641,74.676
  Signal Layer 2 w0.25: v1(33.858,50.341) 33.858,49.987 33.782,49.911 34.123,49.57 34.892,49.57 35.078,49.756 36.094,49.756 36.094,54.838
  Signal Layer 2 w0.3: 36.094,54.838 36.094,55.652 40.894,60.452 v1(40.894,66.548)
  Bottom Layer w0.25: v1(33.858,50.341) 33.888,50.311 33.888,49.123 34.377,48.633 34.377,48.014 34.283,47.92 U2.41@34.283,46.743
  Bottom Layer w5: Q6.2@48.641,64.684 Q6.2@48.641,66.573 pad.3@48.641,74.295
NetC1_2: C1.2 U1.12 X1.1 | length 8.7
  Top Layer w0.3: C1.2@13.589,32.561 X1.1@15.856,32.561 ; X1.1@16.256,32.161 18.146,30.271 18.146,29.476 19.428,28.194 20.586,28.194 U1.12@20.594,28.186
NetC2_2: C2.2 U1.73 | length 3.8
  Top Layer w0.3: U1.73@35.794,32.686 37.143,32.686 37.335,32.878 37.849,32.878 38.041,32.686 38.704,32.686 C2.2@39.243,33.225
NetC3_2: C3.2 U1.13 X1.2 | length 7.4
  Top Layer w0.3: C3.2@13.589,27.461 15.983,27.461 16.519,27.996 18.986,27.996 19.296,27.686 U1.13@20.594,27.686
NetC4_2: C4.2 U1.49 | length 2.1
  Top Layer w0.3: U1.49@33.694,20.086 33.694,18.249 C4.2@33.909,18.034
NetC5_2: C5.2 L1.1 U1.21 | length 11.9
  Top Layer w0.3: C5.2@10.844,23.495 11.098,23.241 11.753,23.241 11.753,24.116 11.93,24.293 13.48,24.293 13.657,24.116 13.657,23.241 L1.1@14.605,23.241 15.05,23.686 U1.21@20.594,23.686
NetC6_2: C6.2 H4.10 R5.1 S1.2 U1.14 | length 85.8
  Top Layer w0.3: R5.1@16.891,25.908 16.891,26.035 17.465,26.609 17.681,26.609 17.858,26.786 17.858,27.117 18.285,27.544 18.799,27.544 19.165,27.178 21.971,27.178 26.157,22.992 26.187,23.023 26.187,23.126 26.068,23.245 26.068,23.745 26.703,24.38 26.703,25.293 27.175,25.766 28.844,25.766 30.48,24.13 v1(30.353,24.13) ; v1(37.016,18.982) 37.016,19.084 37.003,19.096 37.375,19.468 S1.2@48.438,19.468 ; C6.2@42.799,41.197 42.799,42.012 H4.10@44.425,43.637 44.425,41.3 44.831,40.894 v1(44.958,40.894) ; v1(48.142,20.701) 48.142,19.799 48.124,19.781 S1.2@48.438,19.468 ; S1.2@56.388,19.486 S1.2@48.438,19.486 S1.2@48.438,19.468
  Signal Layer 1 w0.3: v1(30.353,24.13) 32.131,24.13 32.146,24.115 32.388,24.115 32.57,23.932 33.972,23.932 34.656,23.249 34.656,21.866 34.384,21.594 34.384,20.449 35.852,18.982 v1(37.016,18.982) ; v1(44.958,40.894) 36.957,32.893 36.99,32.86 36.99,32.532 36.972,32.515 36.972,32.001 46.113,22.86 46.355,22.86 48.142,21.073 v1(48.142,20.701)
NetC7_2: C7.2 R7.1 R8.1 U1.29 | length 6.4
  Top Layer w0.3: R7.1@20.701,16.764 R8.1@22.225,16.764 C7.2@23.749,16.764 23.694,16.819 U1.29@23.694,20.086
NetC8_2: C8.2 L2.1 U1.22 | length 11.7
  Top Layer w0.3: C8.2@10.668,21.336 C8.2@10.844,21.336 10.844,21.242 11.93,20.157 13.48,20.157 14.533,21.209 L2.1@14.605,21.209 16.582,23.186 U1.22@20.594,23.186
NetC12_1: C12.1 U1.8 X2.2 | length 12.6
  Top Layer w0.3: C12.1@14.732,38.608 14.732,36.581 X2.2@14.727,36.576 14.727,35.316 16.177,33.866 17.869,33.866 18.387,33.348 18.387,31.656 19.242,30.801 19.242,30.186 U1.8@20.594,30.186
NetC13_1: C13.1 U1.9 X2.1 | length 14.1
  Top Layer w0.3: X2.1@12.827,36.576 15.99,33.413 17.681,33.413 17.858,33.236 17.858,31.545 18.789,30.614 18.789,29.999 19.054,29.734 19.102,29.734 19.149,29.686 U1.9@20.594,29.686
  Top Layer w0.4: C13.1@12.7,38.608 12.7,36.703 X2.1@12.827,36.576
NetC14_2: C14.2 R27.1 U1.58 | length 55.5
  Top Layer w0.25: U1.58@35.794,25.186 39.33,25.186 40.278,24.238 40.278,24.098 40.862,23.514 43.531,23.514 C14.2@43.766,23.749
  Top Layer w0.3: v1(7.493,48.26) 8.128,48.895 R27.1@8.128,49.149 ; v1(32.783,25.163) 32.838,25.163 32.856,25.146 33.11,25.4 33.324,25.186 U1.58@35.794,25.186
  Signal Layer 1 w0.3: v1(19.939,35.941) 20.357,35.941 21.358,36.942 21.974,36.942 22.479,36.437 22.479,31.877 v1(23.876,30.48) ; v1(30.988,24.765) 32.041,24.765 32.168,24.638 v1@32.77,25.24
  Signal Layer 2 w0.3: v1(7.493,48.26) 7.605,48.148 7.605,46.86 7.381,46.636 7.381,45.971 17.411,35.941 v1(19.939,35.941) ; v1(23.876,30.48) 28.448,30.48 30.988,27.94 v1(30.988,24.765)
NetC15_2: C15.2 R26.1 U1.57 | length 9.8
  Top Layer w0.25: U1.57@35.794,24.686 39.244,24.686 39.261,24.686 39.875,24.072 39.875,23.931 40.695,23.111 41.499,23.111 42.291,22.319 42.291,22.02 C15.2@42.672,22.02 R26.1@44.196,22.02
NetC16_2: C16.2 R25.1 U1.56 | length 6.6
  Top Layer w0.25: U1.56@35.794,24.186 38.123,24.186 39.624,22.685 R25.1@39.624,22.02 C16.2@41.148,22.02
NetC17_2: C17.2 H18.5 R37.1 U1.5 | length 40.6
  Top Layer w0.3: H18.5@11.303,60.737 11.43,60.61 13.177,60.61 13.605,60.182 13.605,51.498 12.055,49.948 11.43,49.948 C17.2@11.43,49.1 11.635,48.895 11.762,49.022 v1(13.208,49.022) ; v1(11.43,46.355) R37.1@11.43,47.244 R37.1@11.43,47.498 ; v1(17.653,35.306) 17.653,35.052 18.839,33.866 18.839,33.332 19.242,32.93 19.242,31.999 19.554,31.686 U1.5@20.594,31.686
  Signal Layer 1 w0.3: v1(13.208,49.022) 12.954,49.022 11.43,47.498 v1(11.43,46.355) 17.653,40.132 v1(17.653,35.306)
NetC30_2: C30.2 R47.2 U2.23 | length 7.4
  Bottom Layer w0.25: R47.2@30.05,34.671 30.52,34.671 30.52,35.453 30.783,35.715 30.783,35.805 30.259,36.329 30.259,37.052 30.604,37.398 30.604,37.747 30.629,37.772 30.629,37.943 30.783,38.096 U2.23@30.783,39.243
  Bottom Layer w0.3: C30.2@28.37,34.671 28.482,34.783 29.938,34.783 R47.2@30.05,34.671
NetC33_2: C33.2 R49.2 | length 1.6
  Bottom Layer w0.25: R49.2@45.095,35.179 C33.2@46.736,35.179
NetC34_2: C34.2 U2.13 | length 7.3
  Bottom Layer w0.25: C34.2@35.052,33.274 35.052,33.878 35.321,34.148 36.154,34.148 36.309,34.303 36.309,35.94 36.087,36.163 36.087,37.238 35.6,37.725 35.6,38.219 35.783,38.402 U2.13@35.783,39.243
NetC36_2: C36.2 R49.1 U2.2 | length 5.6
  Bottom Layer w0.25: U2.2@41.283,39.243 41.283,37.739 41.869,37.153 41.9,37.153 41.918,37.171 42.41,37.171 42.759,36.822 42.759,36.703 C36.2@43.385,36.703 43.385,35.189 R49.1@43.395,35.179
NetC37_1: C37.1 R63.1 U7.14 | length 9.3
  Bottom Layer w0.25: R63.1@4.523,7.488 6.477,9.442 ; C37.1@6.477,10.668 6.477,9.442 ; U7.14@10.255,12.416 10.255,11.906 8.763,10.414 7.449,10.414 6.477,9.442
NetC38_1: C38.1 U2.15 | length 5.4
  Bottom Layer w0.25: C38.1@33.782,34.925 33.909,34.925 C38.1@34.036,35.052 ; C38.1@34.036,34.925 C38.1@34.036,35.052 ; U2.15@34.783,39.243 34.815,39.243 34.815,37.4 35.295,36.921 35.295,36.311 C38.1@34.036,35.052
NetC38_2: C38.2 U2.14 | length 4.8
  Bottom Layer w0.23: U2.14@35.283,39.243 35.208,39.168 35.208,37.563 35.687,37.083 35.687,35.13 C38.2@35.609,35.052 ; C38.2@35.482,34.925 C38.2@35.609,35.052 ; C38.2@35.736,34.925 C38.2@35.609,35.052
NetC43_2: C43.2 U2.56 | length 6.1
  Top Layer w0.25: v1@43.277,49.149 v1(43.18,49.149) 43.18,50.198 44.18,51.197 44.18,51.302 C43.2@44.391,51.513
  Bottom Layer w0.25: U2.56@41.783,46.743 41.783,47.726 42.231,48.173 42.537,48.173 43.18,48.816 v1(43.18,49.149)
NetC44_1: C44.1 U2.52 | length 5.5
  Top Layer w0.25: v1@41.32,50.24 v1(41.32,50.333) C44.1@41.32,51.513
  Bottom Layer w0.25: U2.52@39.783,46.743 39.783,48.796 v1(41.32,50.333)
NetC44_2: C44.2 D2.2 L4.1 U2.50 U2.51 | length 41.8
  Top Layer w0.5: C44.2@41.32,53.213 41.32,53.639 41.947,54.266 42.67,54.266 v1@42.799,54.394 ; v1(42.799,54.356) v1@42.799,54.394 ; v1@42.799,54.394 42.837,54.394 42.799,54.432 v1@42.799,54.394
  Signal Layer 1 w0.5: v1(39.029,48.474) 41.427,46.076 42.824,46.076 v1(42.926,45.974)
  Signal Layer 2 w0.5: v1(39.029,48.474) 40.6,50.045 40.6,50.631 41.022,51.053 41.047,51.053 42.926,52.932 42.799,53.059 v1(42.799,54.356) ; v1(57.531,43.561) 57.658,43.434 v1(57.658,38.1)
  Bottom Layer w0.5: 39.037,46.228 39.037,47.323 ; v1(42.926,45.974) 43.138,46.186 53.128,46.186 54.991,44.323 D2.2@56.007,44.323 56.769,43.561 v1(57.531,43.561) ; L4.1@55.499,36.576 56.134,36.576 v1(57.658,38.1)
  Bottom Layer w0.7: 39.029,46.743 v1(39.029,48.474)
NetC46_2: C46.2 U2.27 | length 3.4
  Bottom Layer w0.3: C46.2@26.543,38.686 26.896,38.333 27.689,38.333 27.856,38.166 28.558,38.166 28.783,38.39 U2.27@28.783,39.243
NetC51_2: C51.2 U2.48 | length 5.3
  Top Layer w0.25: C51.2@38.25,51.513 38.481,51.282 v1(38.481,50.165) v1@38.353,50.165
  Bottom Layer w0.25: U2.48@37.783,46.743 37.758,46.768 37.758,47.466 37.856,47.564 37.856,47.633 37.881,47.658 37.881,48.281 37.954,48.355 37.954,49.308 37.937,49.326 37.937,49.621 v1(38.481,50.165)
NetC52_2: C52.2 U2.43 | length 16.5
  Top Layer w0.25: v1(30.099,54.864) 32.362,54.864 32.818,54.408 33.072,54.662 33.644,54.091 C52.2@33.644,53.213
  Signal Layer 2 w0.25: v1(30.099,54.864) 31.242,54.864 31.369,54.737 31.623,54.991 35.433,51.181 v1(35.433,50.419)
  Bottom Layer w0.25: U2.43@35.283,46.743 35.283,47.765 35.253,47.794 35.253,50.239 v1(35.433,50.419)
NetC53_2: C53.2 U2.38 | length 6.4
  Top Layer w0.25: v1(30.48,50.038) v1@30.48,50.195 ; v1@30.528,50.243 v1@30.48,50.195 ; C53.2@30.573,51.513 30.48,51.42 v1@30.48,50.195
  Bottom Layer w0.25: v1(30.48,50.038) 31.443,50.038 32.642,48.84 32.642,47.771 32.685,47.727 32.685,47.658 32.783,47.56 U2.38@32.783,46.743
NetC56_2: C56.2 R56.1 U2.33 | length 10
  Top Layer w0.25: v1@25.967,50.127 v1(25.967,50.333) R56.1@25.967,51.513
  Top Layer w0.3: C56.2@24.432,51.464 25.918,51.464 R56.1@25.967,51.513
  Bottom Layer w0.25: v1(25.967,50.333) 25.967,49.09 27.262,47.795 30.048,47.795 30.258,47.585 30.258,46.768 U2.33@30.283,46.743
NetC58_2: C58.2 C63.1 L5.2 U7.9 | length 15.2
  Bottom Layer w0.25: L5.2@6.477,6.504 6.777,6.204 C58.2@9.144,6.204 ; C63.1@6.731,2.921 8.801,4.991 8.801,5.299 9.139,5.637 9.144,5.637 C58.2@9.144,6.204 ; U7.9@12.755,12.416 12.755,9.834 10.16,7.239 10.16,7.205 9.798,6.843 9.192,6.843 9.144,6.891 C58.2@9.144,6.204
NetC59_1: C59.1 U7.2 X3.1 | length 11.4
  Bottom Layer w0.25: U7.2@16.255,12.416 16.255,11.175 16.223,11.143 17.457,9.909 17.457,9.642 17.915,9.184 19.921,9.184 20.117,9.38 X3.1@21.717,9.38
  Bottom Layer w0.3: X3.1@21.717,9.38 24.003,7.094 C59.1@24.384,7.094
NetC60_2: C60.2 C64.1 L6.2 U7.4 | length 14.2
  Bottom Layer w0.25: U7.4@15.255,12.416 15.255,10.937 13.97,9.652 C60.2@13.97,6.632 C60.2@13.97,6.124 ; C64.1@16.383,2.667 C64.1@16.383,3.009 16.383,3.175 16.115,3.175 14.732,4.558 14.732,5.362 C60.2@13.97,6.124 ; L6.2@16.637,6.345 14.191,6.345 C60.2@13.97,6.124
NetC62_1: C62.1 U7.3 X3.2 | length 12.4
  Bottom Layer w0.25: U7.3@15.755,12.416 15.755,10.775 18.933,7.597 19.423,7.597 21.717,5.303 X3.2@21.717,5.08
  Bottom Layer w0.3: C62.1@20.701,3.157 20.701,4.064 X3.2@21.717,5.08
NetC72_1: C72.1 U2.55 | length 7.5
  Top Layer w0.25: v1(42.291,48.768) 42.037,48.768 42.037,50.165 42.149,50.277 42.149,52.051 42.803,52.705 42.926,52.705 C72.1@42.926,53.086
  Bottom Layer w0.25: U2.55@41.283,46.743 41.283,47.795 42.256,48.768 v1(42.291,48.768)
NetD1_2: D1.2 R89.2 R90.2 | length 5.3
  Top Layer w1: D1.2@75.819,58.928 75.819,55.753 R89.2@75.692,55.626 77.47,55.626 R90.2@77.597,55.753
NetH1_2: H1.2 R2.1 | length 8.7
  Top Layer w0.3: H1.2@21.209,49.256 21.437,49.256 27.178,43.515 R2.1@27.178,43.18
NetH1_3: H1.3 R1.1 | length 12.2
  Top Layer w0.3: H1.3@21.209,50.501 21.442,50.501 25.334,46.609 31.623,46.609 R1.1@31.75,46.482
NetH2_2: H2.2 R3.1 | length 2.8
  Top Layer w0.25: H2.2@20.594,11.303 20.701,11.303 21.167,11.769 21.167,12.068 21.329,12.23 21.628,12.23 R3.1@22.479,13.081
NetH2_3: H2.3 R4.1 | length 1.8
  Top Layer w0.25: H2.3@19.177,11.475 R4.1@19.177,13.081 R4.1@19.349,12.909
NetH3_2: H3.2 R10.1 | length 6.2
  Top Layer w0.3: R10.1@26.797,15.113 30.373,15.113 31.199,14.287 31.432,14.287 32.151,13.568 H3.2@32.151,13.335
NetH3_3: H3.3 R9.1 | length 7.2
  Top Layer w0.3: R9.1@25.273,15.113 25.527,15.113 25.527,14.905 26.172,14.261 27.422,14.261 27.599,14.438 27.599,14.605 30.189,14.605 30.734,14.06 30.734,13.507 H3.3@30.906,13.335
NetH4_2: H4.2 U1.72 | length 22.2
  Top Layer w0.3: U1.72@35.794,32.186 37.52,32.186 v1(37.592,32.258) 37.38,32.258 v1@37.355,32.234 ; v1(49.403,45.339) 49.403,43.739 H4.2@49.505,43.637
  Signal Layer 1 w0.3: v1(37.592,32.258) 37.592,32.881 41.907,37.196 42.421,37.196 42.438,37.178 42.512,37.178 49.403,44.069 v1(49.403,45.339)